# Altium PCB PCB3.PcbDoc
Units mil, origin at the board's own origin, x right, y up, seen from the top; angles counter-clockwise.
Board outline 2655 x 1945 mil, 2 copper layers (Top Layer, Bottom Layer); 17 components, 19 nets, 130 pads, 2 vias.
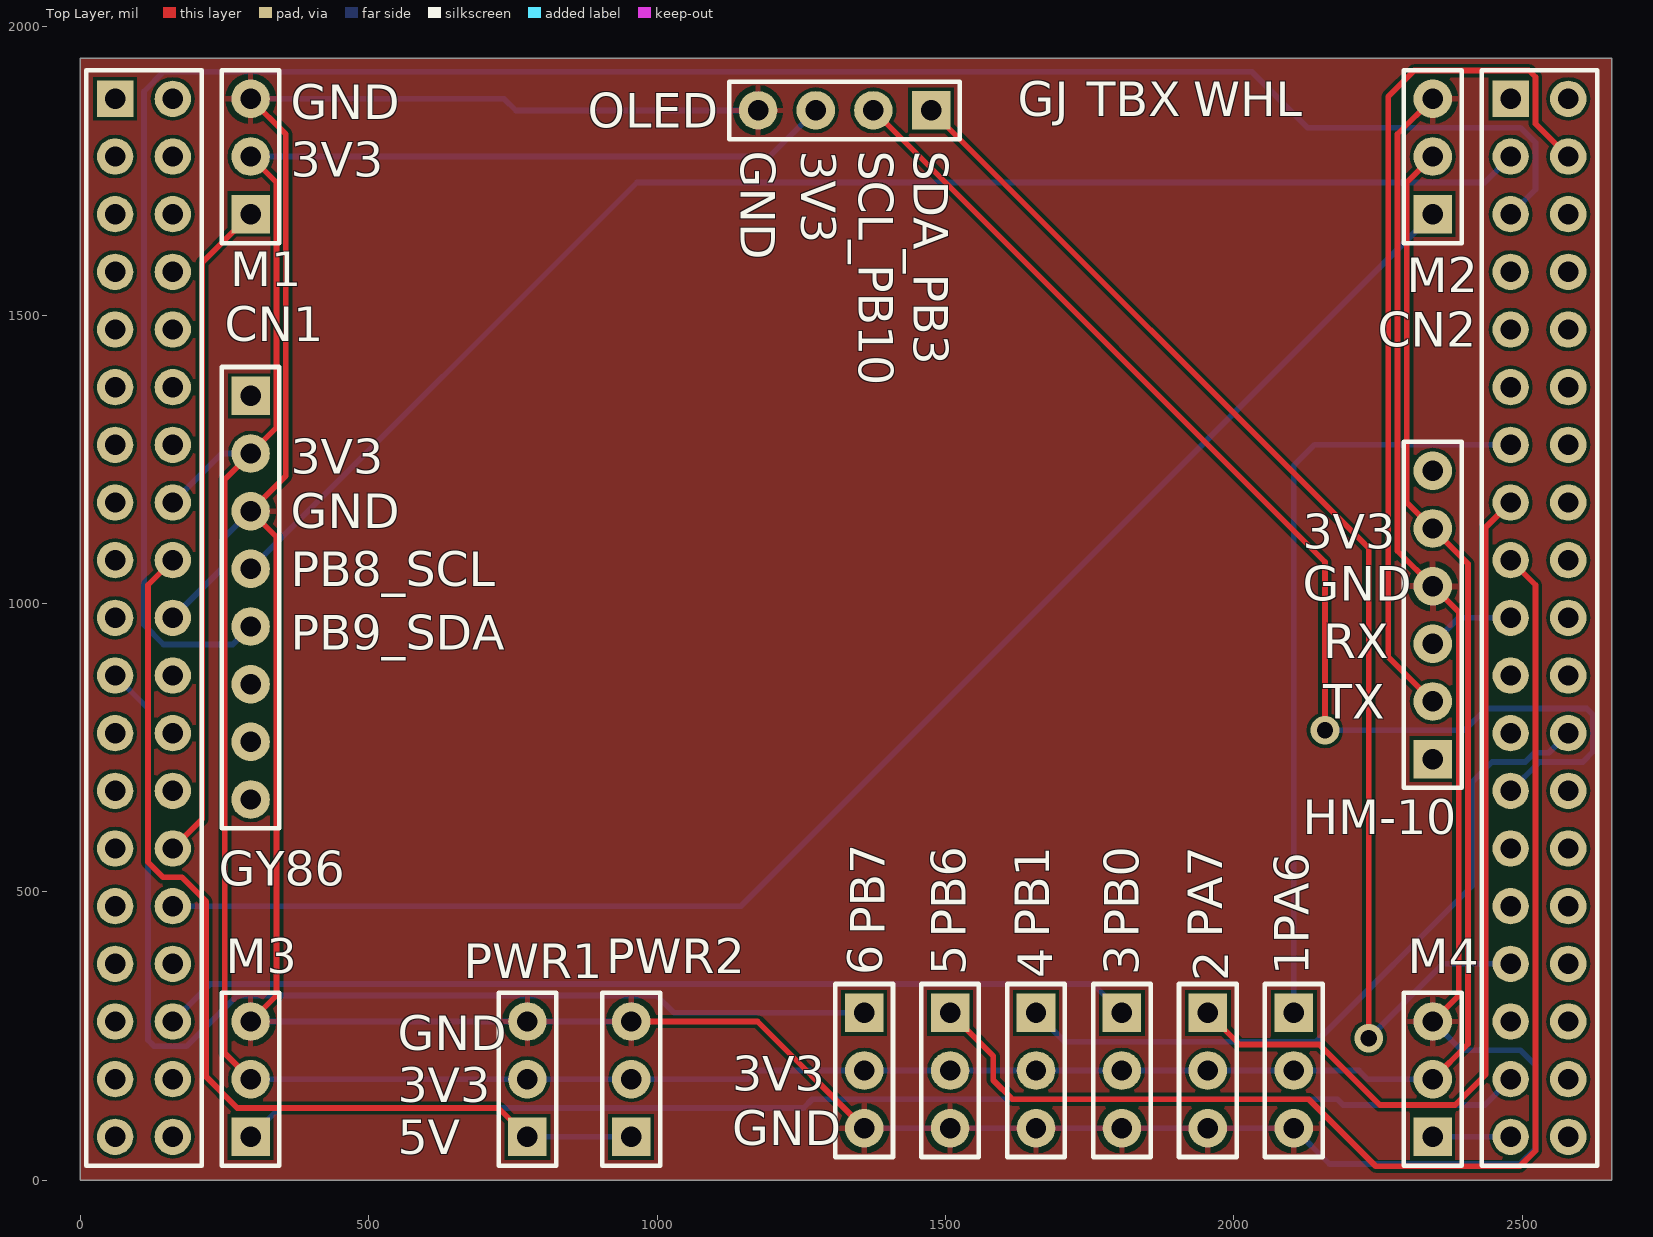
[diagram p0: Top Layer view]
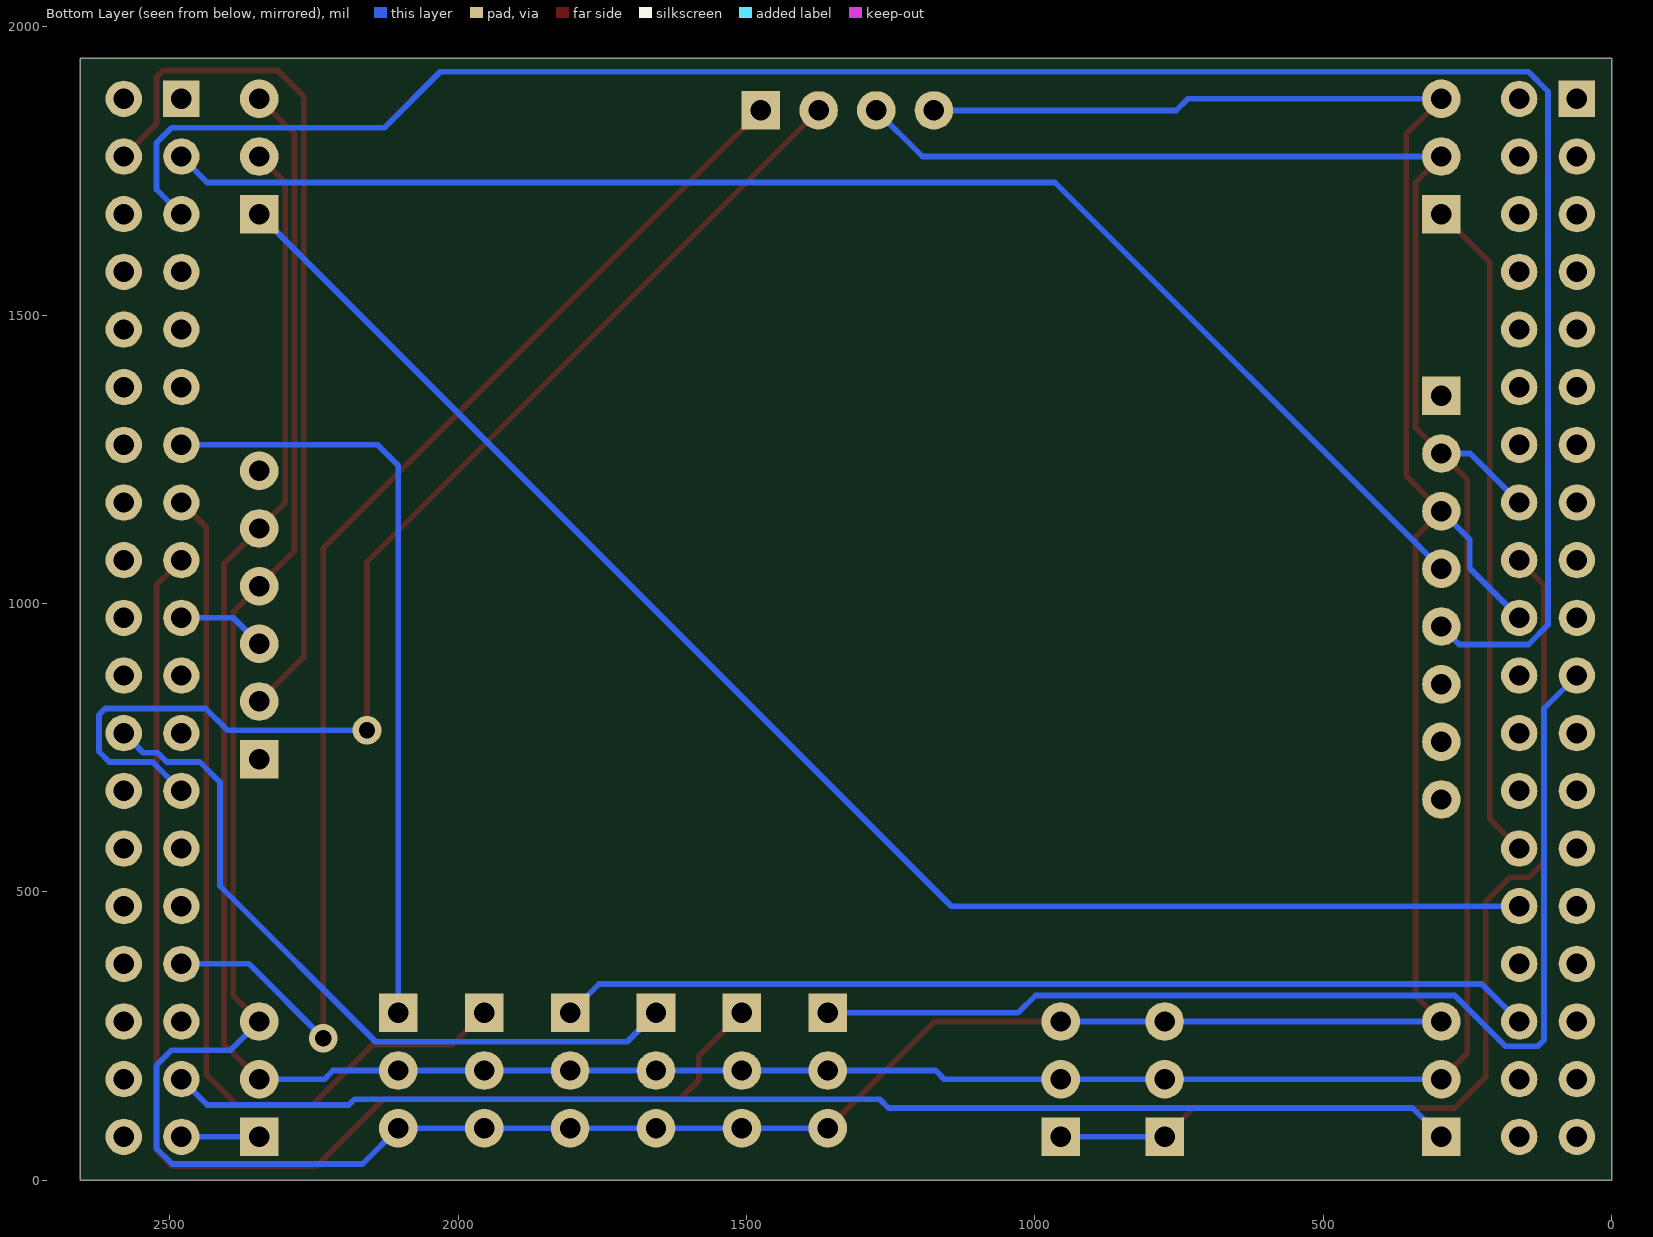
[diagram p1: Bottom Layer view, seen from below]

## Layer stack, top to bottom
Top Solder: solder mask 0.4, Solder Resist, Dk 3.5
Top Layer: signal copper 1.4
Dielectric 1: dielectric 12.6, FR-4, Dk 4.8
Bottom Layer: signal copper 1.4
Bottom Solder: solder mask 0.4, Solder Resist, Dk 3.5

## Board outline
0,0 0,1945 2655,1945 2655,0

## Design rules (kind name [scope] priority, off if disabled: settings)
Clearance [All] p1: gap=6 ignorepadtopadclearanceinfootprint=FALSE except(10: Arc-Poly)
PolygonConnect [All] p1: connectstyle=Relief reliefconductorwidth=10 reliefentries=4 polygonreliefangle="90 Angle" airgapwidth=10
RoutingVias [All] p1: holewidth=28 width=50 viastyle="Through Hole" minholewidth=28 minwidth=50 maxholewidth=28 maxwidth=50
SolderMaskExpansion [All] p1: expansion=4
Width [All] p1: maxlimit=10 minlimit=10 preferedwidth=10
Width Width_1 [All] p2: maxlimit=10 minlimit=10 preferedwidth=10
Width Width_2 [InNet('5V')] p3: maxlimit=24 minlimit=10 preferedwidth=23 minimp=50.000000 maximp=50.000000 favimp=50.000000
30 further rules are at their usual default settings.

## Components (designator, comment, footprint, x,y, rotation, side; value= is the part's Value field where it differs from the comment)
1 "CON3" HDR2.54-M-LI-3P 2104,190 r270 top
2 "CON3" HDR2.54-M-LI-3P 1955,190 r270 top
3 "CON3" HDR2.54-M-LI-3P 1806,190 r270 top
4 "CON3" HDR2.54-M-LI-3P 1657,190 r270 top
5 "CON3" HDR2.54-M-LI-3P 1508,190 r270 top
6 "CON3" HDR2.54-M-LI-3P 1359,190 r270 top
CN1 "Header 19X2" HDR2.54-LI-2x19P 110,975 r270 top
CN2 "Header 19X2" HDR2.54-LI-2x19P 2530,975 r270 top locked
GY86 "CON8" HDR2.54-M-LI-8P 295,1010 r270 top
HM-10 "CON6" HDR2.54-M-LI-6P 2345,980 r90 top
M1 "CON3" HDR2.54-M-LI-3P 295,1775 r90 top
M2 "CON3" HDR2.54-M-LI-3P 2345,1775 r90 top
M3 "CON3" HDR2.54-M-LI-3P 295,175 r90 top
M4 "CON3" HDR2.54-M-LI-3P 2345,175 r90 top
OLED "CON4" HDR2.54-M-LI-4P 1325,1855 r180 top
PWR1 "CON3" HDR2.54-M-LI-3P 775,175 r90 top
PWR2 "CON3" HDR2.54-M-LI-3P 955,175 r90 top

## Footprints (in the part's own frame and the unit in brackets; to place one, negate y for a bottom-side part, rotate by r counter-clockwise, add the part's x,y. Pads: shape width x height; smd on the part's side, far side on the other; paste and mask are expansions set on the pad)
HDR2.54-LI-2x19P [mm] "双排排针，19x2脚"
  rect 1.6x1.6 hole 0.9: 1(-22.86,-1.27)
  round 1.6 hole 0.9: 2(-22.86,1.27) 3(-20.32,-1.27) 4(-20.32,1.27) 5(-17.78,-1.27) 6(-17.78,1.27) 7(-15.24,-1.27) 8(-15.24,1.27) 9(-12.7,-1.27) 10(-12.7,1.27) 11(-10.16,-1.27) 12(-10.16,1.27) 13(-7.62,-1.27) 14(-7.62,1.27) 15(-5.08,-1.27) 16(-5.08,1.27) 17(-2.54,-1.27) 18(-2.54,1.27) 19(0,-1.27) 20(0,1.27) 21(2.54,-1.27) 22(2.54,1.27) 23(5.08,-1.27) 24(5.08,1.27) 25(7.62,-1.27) 26(7.62,1.27) 27(10.16,-1.27) 28(10.16,1.27) 29(12.7,-1.27) 30(12.7,1.27) 31(15.24,-1.27) 32(15.24,1.27) 33(17.78,-1.27) 34(17.78,1.27) 35(20.32,-1.27) 36(20.32,1.27) 37(22.86,-1.27) 38(22.86,1.27)
  silkscreen extent -24.13,-2.54 24.13,2.54, body extent -24.13,-2.54 24.13,2.54, height 8.5
HDR2.54-M-LI-3P [mm] "排母，3脚"
  rect 1.7x1.7 hole 0.9: 1(-2.54,0)
  round 1.7 hole 0.9: 2(0,0) 3(2.54,0)
  silkscreen extent -3.81,-1.27 3.81,1.27, body extent -3.81,-1.27 3.81,1.27, height 8.5
HDR2.54-M-LI-4P [mm] "排母，4脚"
  rect 1.7x1.7 hole 0.9: 1(-3.81,0)
  round 1.7 hole 0.9: 2(-1.27,0) 3(1.27,0) 4(3.81,0)
  silkscreen extent -5.08,-1.27 5.08,1.27, body extent -5.08,-1.27 5.08,1.27, height 8.5
HDR2.54-M-LI-6P [mm] "排母，6脚"
  rect 1.7x1.7 hole 0.9: 1(-6.35,0)
  round 1.7 hole 0.9: 2(-3.81,0) 3(-1.27,0) 4(1.27,0) 5(3.81,0) 6(6.35,0)
  silkscreen extent -7.62,-1.27 7.62,1.27, body extent -7.62,-1.27 7.62,1.27, height 8.5
HDR2.54-M-LI-8P [mm] "排母，8脚"
  rect 1.7x1.7 hole 0.9: 1(-8.89,0)
  round 1.7 hole 0.9: 2(-6.35,0) 3(-3.81,0) 4(-1.27,0) 5(1.27,0) 6(3.81,0) 7(6.35,0) 8(8.89,0)
  silkscreen extent -10.16,-1.27 10.16,1.27, body extent -10.16,-1.27 10.16,1.27, height 8.5

## Part data
CN1 CN2: "Header, 19-Pin, Dual row", Publisher="Altium Limited", Revision="17-Jul-2002: Re-released for DXP Platform."

## Via types
v1: diameter 50, hole 28, Top Layer to Bottom Layer, 2 vias

## Nets (pads, with @x,y where several pads share a name; then routed paths per layer and width w, separated by ;. In a path a pad name is that pad's centre, name@x,y a point inside that pad or via, vN(x,y) a via of type N, cw(c..) or ccw(c..) an arc to the next point about the centre after c; other vN are vias at no path point)
3V3: 1.2 2.2 3.2 4.2 5.2 6.2 CN1.16 GY86.2 HM-10.5 M1.2 M2.2 M3.2 M4.2 OLED.3 PWR1.2 PWR2.2 | length 6608.1
  Top Layer w10: M3.2 250,220 250,1215 GY86.2 340,1305 340,1730 M1.2 ; M4.2 2406,236 2406,1069 HM-10.5 2300,1175 2300,1730 M2.2
  Bottom Layer w10: CN1.16 245,1260 GY86.2 ; M3.2 PWR1.2 PWR2.2 1157,175 1172,190 6.2 5.2 4.2 3.2 2.2 1.2 2217,190 2232,175 M4.2 ; M1.2 1195,1775 OLED.3
5V: CN1.18 PWR1.1 PWR2.1 | length 1755.1
  Top Layer w10: CN1.18 117,1032 117,551 143,525 176,525 218,483 218,179 272,125 725,125 PWR1.1
  Bottom Layer w10: PWR1.1 PWR2.1
GND: 1.3 2.3 3.3 4.3 5.3 6.3 CN1.20 GY86.3 HM-10.4 M1.3 M2.3 M3.3 M4.3 OLED.4 PWR1.3 PWR2.3 | length 7199.8
  Top Layer w10: M3.3 340,320 340,1115 GY86.3 356,1221 356,1814 M1.3 ; PWR2.3 1174,275 6.3 ; M4.3 2390,320 2390,985 HM-10.4 2284,1091 2284,1814 M2.3
  Bottom Layer w10: CN1.20 246,1061 246,1111 GY86.3 ; M3.3 PWR1.3 PWR2.3 ; M1.3 735,1875 755,1855 OLED.4 ; 6.3 5.3 4.3 3.3 2.3 1.3 2166,28 2496,28 2523,55 2523,199 2497,225 2395,225 M4.3
PA0: CN1.28 M1.1 | length 1155.9
  Top Layer w10: CN1.28 211,626 211,1591 M1.1
PA1: CN1.30 M2.1 | length 2682.1
  Bottom Layer w10: CN1.30 1145,475 M2.1
PA2: CN2.35 M3.1 | length 2234.7
  Bottom Layer w10: M3.1 345,125 1254,125 1269,140 2180,140 2190,130 2435,130 CN2.35
PA3: CN2.37 M4.1 | length 135
  Bottom Layer w10: M4.1 CN2.37
PA6: 1.1 CN2.13 | length 1339.9
  Bottom Layer w10: 1.1 2104,1239 2140,1275 CN2.13
PA7: 2.1 CN2.15 | length 1580
  Top Layer w10: 2.1 2010,235 2148,235 2253,130 2384,130 2437,183 2437,1132 CN2.15
PB0: 3.1 CN1.34 | length 1693.6
  Bottom Layer w10: CN1.34 225,340 1756,340 3.1
PB1: 4.1 CN2.24 | length 1270.8
  Bottom Layer w10: 4.1 1707,240 2143,240 2413,510 2413,690 2448,725 2505.5,725 2521.5,741 2546,741 CN2.24
PB3_SDA: CN2.31 OLED.1 | length 2222.8
  Top Layer w10: OLED.1 2234,1096 v1(2234,246)
  Bottom Layer w10: v1(2234,246) 2363,375 CN2.31
PB6: 5.1 CN2.17 | length 2202.8
  Top Layer w10: 5.1 1583,215 1583,173 1616,140 2130,140 2246,24 2496,24 2523,51 2523,1032 CN2.17
PB7: 6.1 CN1.21 | length 1951
  Bottom Layer w10: CN1.21 117,818 117,243 128,232 184,232 272,320 999,320 1029,290 6.1
PB8_SCL: CN2.3 GY86.4 | length 2481.2
  Bottom Layer w10: GY86.4 965,1730 2435,1730 CN2.3
PB9_SDA: CN2.5 GY86.5 | length 3756.8
  Bottom Layer w10: GY86.5 264,929 144,929 110,963 110,1888 144,1922 2031,1922 2128,1825 2497,1825 2523,1799 2523,1718 CN2.5
PB10_SCL: CN2.25 OLED.2 | length 2119.8
  Top Layer w10: OLED.2 2158,1072 v1(2158,780)
  Bottom Layer w10: v1(2158,780) 2400,780 2438,818 2612,818 2623,807 2623,743 2605,725 2530,725 CN2.25
PC6_TX: CN2.4 HM-10.2 | length 1520.7
  Top Layer w10: HM-10.2 2268,907 2268,1879 2313,1924 2512,1924 2523,1913 2523,1832 CN2.4
PC7_RX: CN2.19 HM-10.3 | length 153.6
  Bottom Layer w10: HM-10.3 2390,975 CN2.19
pads on no net: CN1.1 CN1.2 CN1.3 CN1.4 CN1.5 CN1.6 CN1.7 CN1.8 CN1.9 CN1.10 CN1.11 CN1.12 CN1.13 CN1.14 CN1.15 CN1.17 CN1.19 CN1.22 CN1.23 CN1.24 CN1.25 CN1.26 CN1.27 CN1.29 CN1.31 CN1.32 CN1.33 CN1.35 CN1.36 CN1.37 CN1.38 CN2.1 CN2.2 CN2.6 CN2.7 CN2.8 CN2.9 CN2.10 CN2.11 CN2.12 CN2.14 CN2.16 CN2.18 CN2.20 CN2.21 CN2.22 CN2.23 CN2.26 CN2.27 CN2.28 CN2.29 CN2.30 CN2.32 CN2.33 CN2.34 CN2.36 CN2.38 GY86.1 GY86.6 GY86.7 GY86.8 HM-10.1 HM-10.6

## Polygon pours and split planes (outlines as drawn)
GND on Top Layer "Top Layer-GND" (solid, pour order 20): 0,1945 2655,1945 2655,0 0,0
no net on Top Layer "Top Layer-No Net" (solid, pour order 14): 25,1935

## Silkscreen, mask and mechanical layers (free items; w line width, h text height)
Top Overlay:
  text "GJ" at 1625,1845 h60
  text "TBX" at 1745,1845 h60
  text "WHL" at 1930,1845 h60
  text "GND" at 365,1840 h60
  text "GND" at 1145,1785 h60 r270
  text "3V3" at 1250,1785 h60 r270
  text "SCL_PB10" at 1350,1785 h60 r270
  text "SDA_PB3" at 1445,1785 h60 r270
  text "3V3" at 365,1740 h60
  text "3V3" at 365,1225 h60
  text "GND" at 365,1130 h60
  text "3V3" at 2120,1095 h60
  text "PB8_SCL" at 365,1030 h60
  text "GND" at 2120,1005 h60
  text "PB9_SDA" at 365,920 h60
  text "RX" at 2155,905 h60
  text "TX" at 2155,800 h60
  text "PB7" at 1395,425 h60 r90
  text "PB6" at 1535,420 h60 r90
  text "PB1" at 1680,420 h60 r90
  text "PB0" at 1835,420 h60 r90
  text "PA7" at 1980,420 h60 r90
  text "PA6" at 2130,410 h60 r90
  text "GND" at 550,225 h60
  text "3V3" at 1130,155 h60
  text "3V3" at 550,135 h60
  text "GND" at 1130,60 h60
  text "5V" at 550,45 h60
Mechanical 1:
  the board outline again, w10